# Altium PCB V2.PcbDoc
Units mil, origin at the board's own origin, x right, y up, seen from the top; angles counter-clockwise.
Board outline 3650 x 3970 mil, 2 copper layers (Top Layer, Bottom Layer); 66 components, 49 nets, 273 pads, 24 vias.
Unrouted connection lines stored in the file: 59.
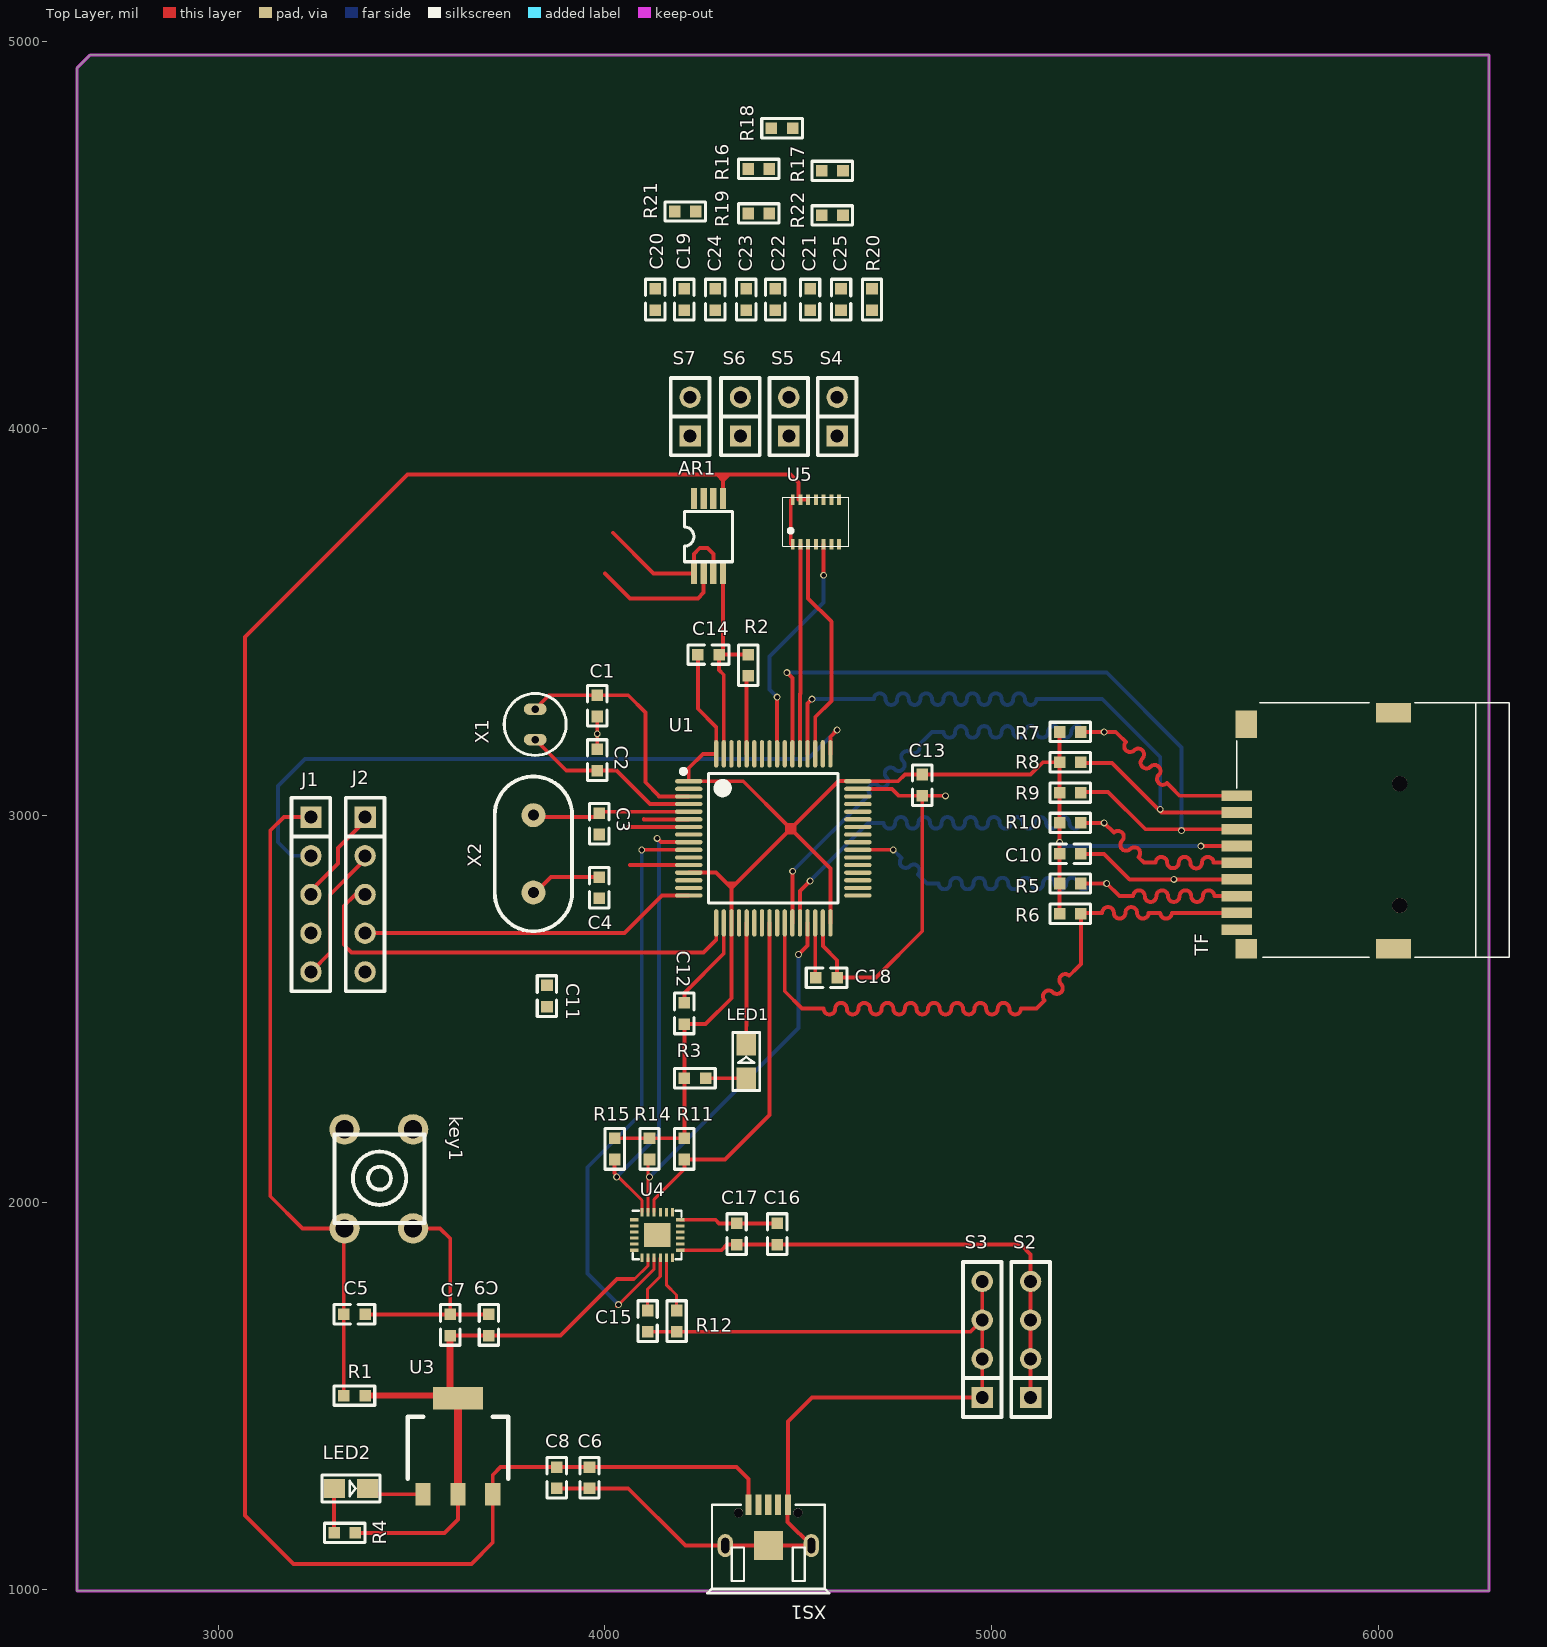
[diagram p0: Top Layer view]
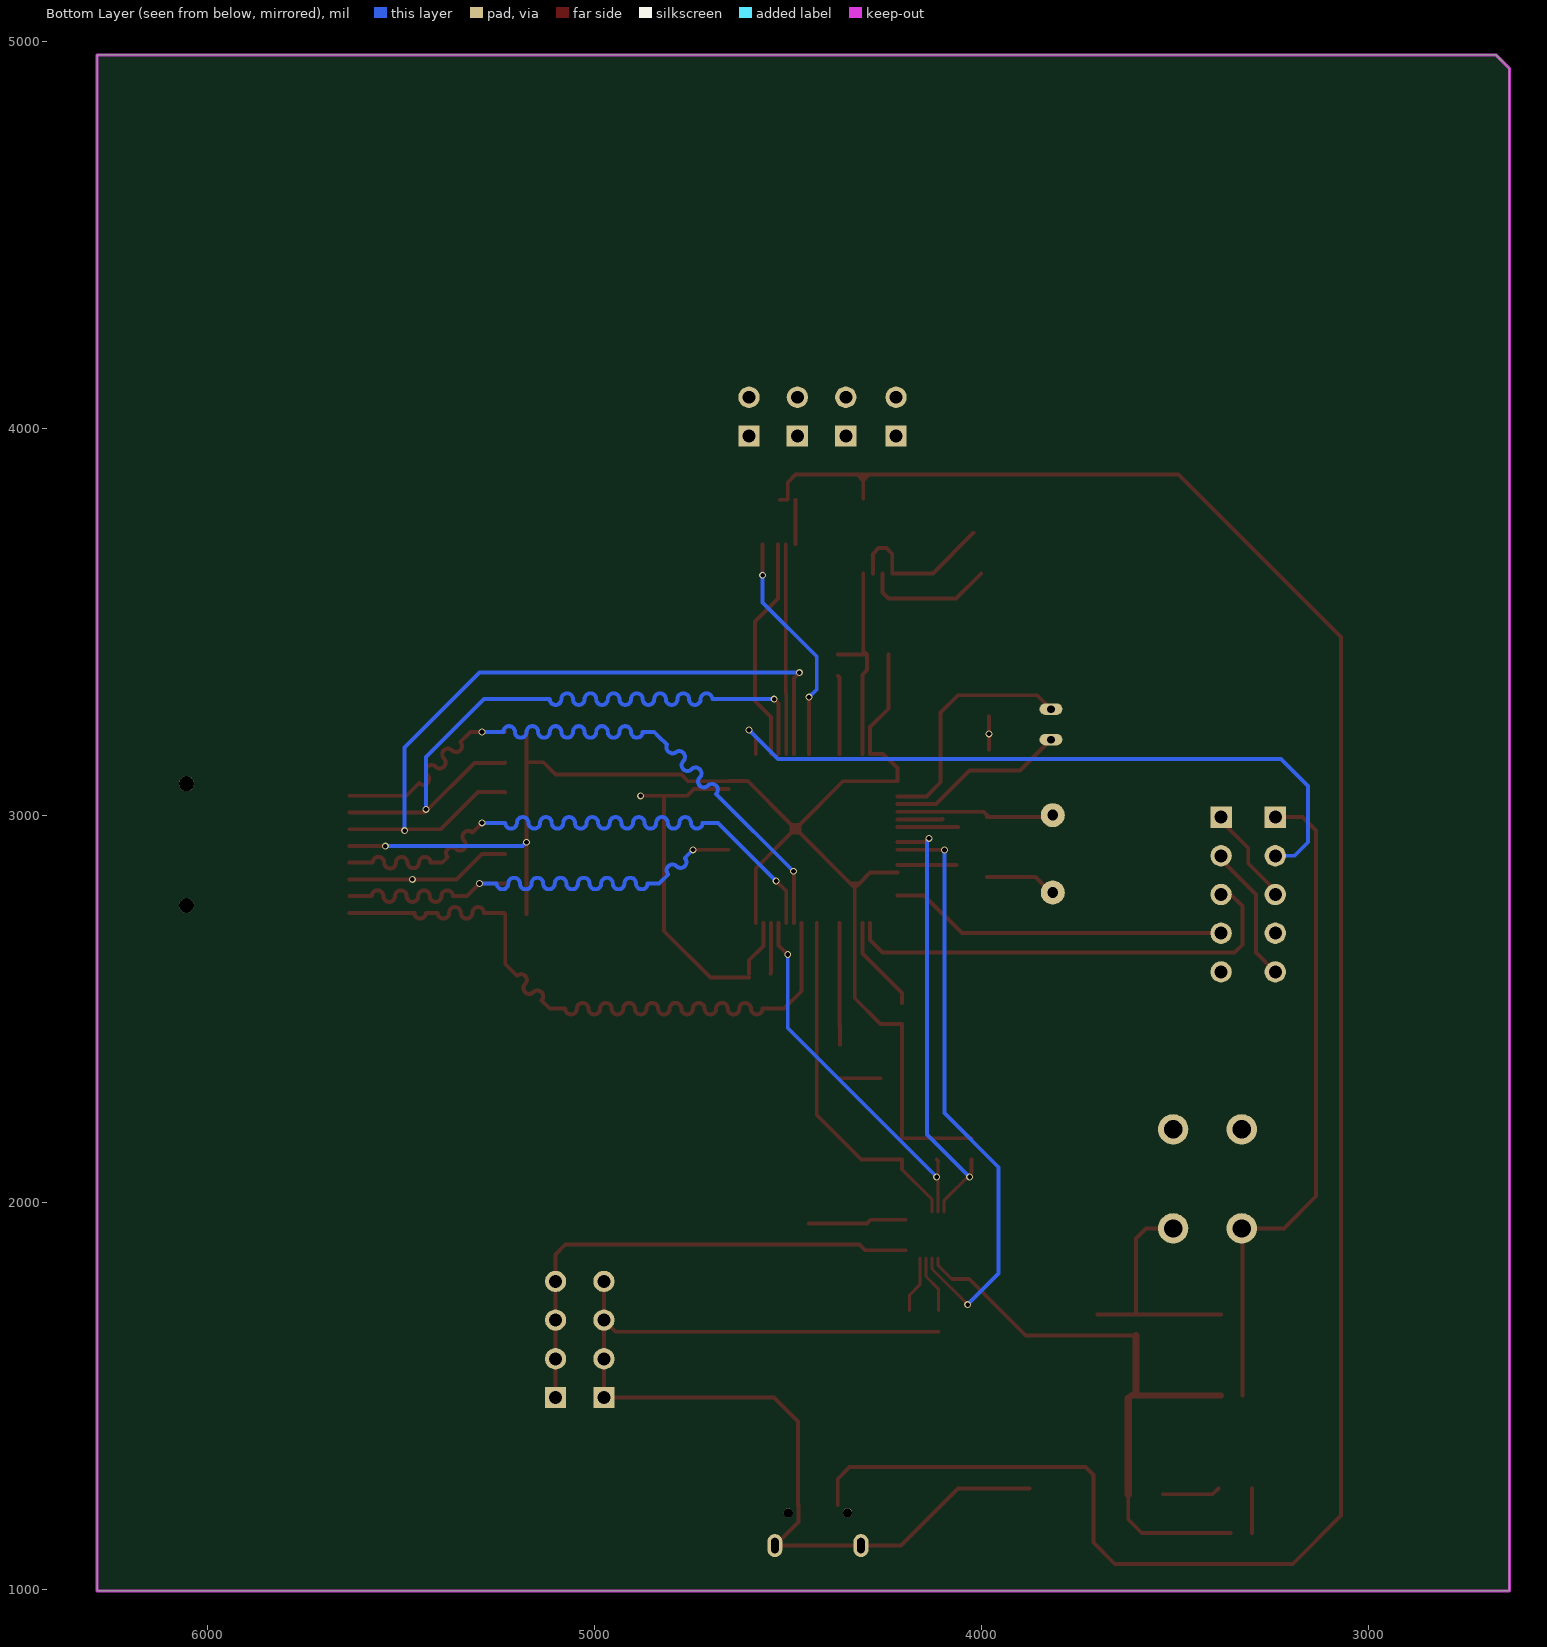
[diagram p1: Bottom Layer view, seen from below]

## Layer stack, top to bottom
Top Solder: solder mask 0.4, Solder Resist, Dk 3.5
Top Layer: signal copper 1.4
Dielectric 1: dielectric 12.6, FR-4, Dk 4.8
Bottom Layer: signal copper 1.4
Bottom Solder: solder mask 0.4, Solder Resist, Dk 3.5

## Board outline
2635,995 2635,4930 2670,4965 6285,4965 6285,995

## Design rules (kind name [scope] priority, off if disabled: settings)
Clearance [All] p1: gap=10
PolygonConnect [All] p1: connectstyle=Relief reliefconductorwidth=10 reliefentries=4 polygonreliefangle="90 Angle" airgapwidth=10
RoutingVias [All] p1: holewidth=28 width=50 viastyle="Through Hole" minholewidth=28 minwidth=50 maxholewidth=28 maxwidth=50
SolderMaskExpansion [All] p1: expansion=4
Width [All] p1: maxlimit=20 minlimit=5 preferedwidth=10
30 further rules are at their usual default settings.

## Classes and differential pairs
net class SD: SDIO_CLK SDIO_CMD SDIO_D0 SDIO_D1 SDIO_D2 SDIO_D3

## Components (designator, comment, footprint, x,y, rotation, side; value= is the part's Value field where it differs from the comment)
AR1 "运算放大器" MSOP-8 4345,3700 r90 top
C1 "10p" 0603-cap 3980,3255 r90 top
C2 "10p" 0603-cap 3980,3170 r270 top
C3 "22p" 0603-cap 3985,2950 r90 top
C4 "22p" 0603-cap 3985,2785 r90 top
C5 "0.1u" 0603-cap 3325,1710 r0 top
C6 "10u" 0603-cap 3960,1315 r270 top
C7 "10u" 0603-cap 3600,1655 r90 top
C8 "0.1u" 0603-cap 3875,1315 r270 top
C9 "0.1u" 0603-cap 3700,1655 r90 top
C10 "0.1u" 0603-cap 5175,2900 r0 top
C11 "10u" 0603-cap 3850,2505 r90 top
C12 "0.1u" 0603-cap 4205,2460 r90 top
C13 "0.1u" 0603-cap 4820,3105 r270 top
C14 "0.1u" 0603-cap 4240,3415 r0 top
C15 "0.1u" 0603-cap 4110,1665 r90 top
C16 "0.01u" 0603-cap 4445,1945 r270 top
C17 "0.1u" 0603-cap 4340,1945 r270 top
C18 "4.7u" 0603-cap 4600,2580 r180 top
C19 "10u" 0603-cap 4205,4360 r270 top
C20 "0.1u" 0603-cap 4130,4360 r270 top
C21 "0.1u" 0603-cap 4530,4305 r90 top
C22 "0.1u" 0603-cap 4440,4360 r270 top
C23 "0.1u" 0603-cap 4365,4305 r90 top
C24 "0.1u" 0603-cap 4285,4305 r90 top
C25 "0.1u" 0603-cap 4610,4305 r90 top
J1 "CON5" SIP05 3240,2995 r270 top
J2 "CON5" SIP05 3380,2995 r270 top
key1 "KEY_1" "key - duplicate5" 3440,2045 r270 top
LED1 "LED?" LED 4365,2320 r90 top
LED2 "LED?" LED 3300,1260 r0 top
R1 "10k" 0603-res 3380,1500 r180 top
R2 "10k" 0603-res 4370,3415 r270 top
R3 "1k" 0603-res 4260,2320 r180 top
R4 "1k" 0603-res 3355,1145 r180 top
R5 "4.7k" 0603-res 5175,2823.33 r0 top
R6 "4.7k" 0603-res 5175,2745 r0 top
R7 "4.7k" 0603-res 5175,3215 r0 top
R8 "4.7k" 0603-res 5175,3136.67 r0 top
R9 "4.7k" 0603-res 5175,3058.33 r0 top
R10 "4.7k" 0603-res 5175,2980 r0 top
R11 "10k" 0603-res 4205,2110 r90 top
R12 "10k" 0603-res 4185,1665 r90 top
R14 "10k" 0603-res 4115,2110 r90 top
R15 "10k" 0603-res 4025,2110 r90 top
R16 "51.1k" 0603-res 4425,4670 r180 top
R17 "51.1k" 0603-res 4615,4665 r180 top
R18 "10K-100K" 0603-res 4485,4775 r180 top
R19 "102K" 0603-res 4425,4555 r180 top
R20 "10K-100K" 0603-res 4690,4360 r270 top
R21 "1K" 0603-res 4235,4560 r180 top
R22 "1K" 0603-res 4615,4550 r180 top
S2 "CON4" SIP04 5100,1495 r90 top
S3 "CON4" SIP04 4975,1495 r90 top
S4 "CON2" SIP02 4600,3980 r90 top
S5 "CON2" SIP02 4475,3980 r90 top
S6 "CON2" SIP02 4350,3980 r90 top
S7 "CON2" SIP02 4220,3980 r90 top
TF "U2" TF-01A 5835,2960 r90 top
U1 "STM32F446RET6" LQFP-64_10X10X05P 4435,2940 r0 top
U3 "ASM117-3.3" SOT-223 3530,1245 r0 top
U4 "MPU9250" QFN-24-1EP_3X3MM_PITCH0.4MM 4135,1915 r0 top
U5 "LTC2486" DFN14 4460,3720 r0 top
X1 "32.768KHz" XTAL-B 3820,3235 r90 top
X2 "8MHz" XTAL2 3675,2910 r180 top
XS1 "USB1" "micro USB" 4425,1170 r180 top

## Footprints (in the part's own frame and the unit in brackets; to place one, negate y for a bottom-side part, rotate by r counter-clockwise, add the part's x,y. Pads: shape width x height; smd on the part's side, far side on the other; paste and mask are expansions set on the pad)
0603-cap [mil]
  rect 30x30 smd: 1(0,0) 2(55,0)
  silkscreen extent -25,-25 80,25
0603-res [mil]
  rect 30x30 smd: 1(0,0) 2(55,0)
  silkscreen extent -25,-25 80,25
DFN14 [mm]
  rect 0.25x0.7 smd: 1(0.635,-0.508) 2(1.143,-0.508) 3(1.651,-0.508) 4(2.159,-0.508) 5(2.667,-0.508) 6(3.175,-0.508) 7(3.683,-0.508) 8(3.683,2.413) 9(3.175,2.413) 10(2.667,2.413) 11(2.159,2.413) 12(1.651,2.413) 13(1.143,2.413) 14(0.635,2.413)
  silkscreen extent 0,-0.64 4.32,2.57
"key - duplicate5" [mm]
  round 2 hole 1.2: 1(2.869,-2.874) 2(-3.631,-2.874) 3(2.869,1.626) 4(-3.631,1.626)
  silkscreen extent -3.28,-3.52 2.52,2.38
LED [mm]
  rect 1.4x1.27 smd: 1(0,0) 2(2.21,0)
  silkscreen extent -0.8,-0.89 3.01,0.89
LQFP-64_10X10X05P [mm]
  oval 1.8x0.28 smd: 1(-5.55,3.75) 2(-5.55,3.25) 3(-5.55,2.75) 4(-5.55,2.25) 5(-5.55,1.75) 6(-5.55,1.25) 7(-5.55,0.75) 8(-5.55,0.25) 9(-5.55,-0.25) 10(-5.55,-0.75) 11(-5.55,-1.25) 12(-5.55,-1.75) 13(-5.55,-2.25) 14(-5.55,-2.75) 15(-5.55,-3.25) 16(-5.55,-3.75) 33(5.55,-3.75) 34(5.55,-3.25) 35(5.55,-2.75) 36(5.55,-2.25) 37(5.55,-1.75) 38(5.55,-1.25) 39(5.55,-0.75) 40(5.55,-0.25) 41(5.55,0.25) 42(5.55,0.75) 43(5.55,1.25) 44(5.55,1.75) 45(5.55,2.25) 46(5.55,2.75) 47(5.55,3.25) 48(5.55,3.75)
  oval 0.28x1.8 smd: 17(-3.75,-5.55) 18(-3.25,-5.55) 19(-2.75,-5.55) 20(-2.25,-5.55) 21(-1.75,-5.55) 22(-1.25,-5.55) 23(-0.75,-5.55) 24(-0.25,-5.55) 25(0.25,-5.55) 26(0.75,-5.55) 27(1.25,-5.55) 28(1.75,-5.55) 29(2.25,-5.55) 30(2.75,-5.55) 31(3.25,-5.55) 32(3.75,-5.55) 49(3.75,5.55) 50(3.25,5.55) 51(2.75,5.55) 52(2.25,5.55) 53(1.75,5.55) 54(1.25,5.55) 55(0.75,5.55) 56(0.25,5.55) 57(-0.25,5.55) 58(-0.75,5.55) 59(-1.25,5.55) 60(-1.75,5.55) 61(-2.25,5.55) 62(-2.75,5.55) 63(-3.25,5.55) 64(-3.75,5.55)
  silkscreen extent -6.05,-4.25 4.25,4.55
"micro USB" [mm]
  rect 0.4x1.35 smd mask+0.05: 1(1.376,-1.211) 2(0.726,-1.211) 3(0.076,-1.211) 4(-0.574,-1.211) 5(-1.224,-1.211)
  oval 1x1.5 hole 0.5 slot 1 at 90 deg unplated mask+0.05: 6(-2.749,1.465) 7(2.901,1.465)
  round 0.6 hole 0.6 mask+0.05: ""(-1.874,-0.686) ""(2.026,-0.686)
  rect 1.9x1.9 smd mask+0.05: ""(0.076,1.465)
  silkscreen extent -3.92,-1.21 4.08,4.59
MSOP-8 [mil]
  rect 55x16 smd: 1(-75,115) 2(-75,90) 3(-75,65) 4(-75,40) 5(118.11,40) 6(118.11,65) 7(118.11,90) 8(118.11,115)
  silkscreen extent -45,15 85,140
QFN-24-1EP_3X3MM_PITCH0.4MM [mm]
  rect 0.55x0.2 smd: 1(-1.5,1) 2(-1.5,0.6) 3(-1.5,0.2) 4(-1.5,-0.2) 5(-1.5,-0.6) 6(-1.5,-1) 13(1.5,-1) 14(1.5,-0.6) 15(1.5,-0.2) 16(1.5,0.2) 17(1.5,0.6) 18(1.5,1)
  rect 0.2x0.55 smd: 7(-1,-1.5) 8(-0.6,-1.5) 9(-0.2,-1.5) 10(0.2,-1.5) 11(0.6,-1.5) 12(1,-1.5) 19(1,1.5) 20(0.6,1.5) 21(0.2,1.5) 22(-0.2,1.5) 23(-0.6,1.5) 24(-1,1.5)
  rect 0.875x0.8 smd: 25(-0.435,-0.4) 25(-0.435,0.4) 25(0.435,-0.4) 25(0.435,0.4)
  silkscreen extent -1.6,-1.6 1.6,1.6
SIP02 [mm]
  rect 1.4x1.4 hole 0.85: 1(0,0)
  round 1.4 hole 0.85: 2(2.54,0)
  silkscreen extent -1.27,-1.27 3.81,1.27
SIP04 [mm]
  rect 1.4x1.4 hole 0.85: 1(0,0)
  round 1.4 hole 0.85: 2(2.54,0) 3(5.08,0) 4(7.62,0)
  silkscreen extent -1.27,-1.27 8.89,1.27
SIP05 [mm]
  rect 1.4x1.4 hole 0.85: 1(0,0)
  round 1.4 hole 0.85: 2(2.54,0) 3(5.08,0) 4(7.62,0) 5(10.16,0)
  silkscreen extent -1.27,-1.27 11.43,1.27
SOT-223 [mil]
  rect 39x59 smd: 1(0,0) 3(180,0)
  rect 38.98x59.06 smd: 2(90,0)
  rect 129.13x59 smd: 2(90,248.03)
  silkscreen extent -40,40 220,200
TF-01A [mm]
  rect 0.7x2 smd: 1(2.291,5.146) 2(1.193,5.143) 3(0.095,5.146) 4(-1.003,5.146) 5(-2.103,5.146) 6(-3.2,5.146) 7(-4.298,5.146) 8(-5.395,5.146) 9(-6.5,5.146)
  rect 1.27x1.397 smd: 10(-7.747,4.507)
  rect 1.27x2.286 smd: 11(-7.747,-5.145) 12(7.747,-5.145)
  rect 1.778x1.397 smd: 13(6.985,4.507)
  round 1 hole 1 unplated: ""(-4.915,-5.557) ""(3.084,-5.554)
  silkscreen extent -8.31,-12.76 8.39,5.14
XTAL2 [mil]
  round 62 hole 28: 1(-140,110) 2(-140,-90)
  silkscreen extent -240,-190 -40,210
XTAL-B [mm]
  oval 0.75x1.5 hole 0.5: 1(-1.011,0.008) 2(0.989,0.008)
  silkscreen extent -2.04,-2.02 2.02,2.04

## Part data
AR1: "Operational Amplifier"
C1 C2 C3 C4 C5 C6 C7 C8 C9 C10 C11 C12 C13 C14 C15 C16 C17 C18 C19 C20 C21 C22 C23 C24 C25: library part CAP
LED1 LED2: library part LED
R1 R2 R3 R4 R5 R6 R7 R8 R9 R10 R11 R12 R14 R15 R16 R17 R18 R19 R20 R21 R22: library part RES
TF: library part TF-01A
X1 X2: library part XTAL

## Via types
v1: diameter 18, hole 12, Top Layer to Bottom Layer, 24 vias

## Nets (pads, with @x,y where several pads share a name; then routed paths per layer and width w, separated by ;. In a path a pad name is that pad's centre, name@x,y a point inside that pad or via, vN(x,y) a via of type N, cw(c..) or ccw(c..) an arc to the next point about the centre after c; other vN are vias at no path point)
3.3V: C7.1 C9.1 C10.1 C11.1 C12.1 C13.1 C14.1 C16.2 C17.2 J1.5 J2.2 R1.1 R3.2 R4.1 R5.1 R6.1 R7.1 R8.1 R9.1 R10.1 R11.2 R14.2 R15.2 S2.1 S2.2 S2.3 S2.4 TF.4 U1.1 U1.13 U1.19 U1.32 U1.48 U1.64 U3.2 U4.1 U4.8 U4.13 | length 7301.7
  Top Layer w8: 4075,1800 4111.38,1836.38 U4.8 ; U4.13 4300.64,1875.63
  Top Layer w10: J1.5 3290,2645 3290,2795 3375,2880 3375,2890 J2.2 ; R4.1 3585,1145 3620,1180 U3.2@3620,1245 ; U3.2@3600,1513.03 3613.03,1500 U3.2@3620,1493.03 ; C7.1 C9.1 3885,1655 4030.93,1800.93 4074.07,1800.93 ; R15.2 R14.2 R11.2 R3.2 C12.1 4260,2460 4326.73,2526.73 U1.19 4326.73,2811.73 ; U1.13 4287.04,2851.42 4315,2823.46 ; C14.1 4240,3275 4287.36,3227.64 U1.64 ; U1.64@4286.54,3158.5 4253.5,3158.5 4216.5,3121.5 U1.1 4357.36,3087.64 4470,2975 ; 4300.64,1875.63 4315,1890 C17.2 C16.2 5075,1890 5100,1865 S2.4 S2.3 S2.2 S2.1 ; U1.32 4582.64,2862.36 4490,2955 ; U1.48 4757.64,3087.64 4775,3105 C13.1 5100,3105 5131.67,3136.67 R8.1 ; U1.48@4653.5,3088.46 4603.46,3088.46 4490,2975 ; R6.1 R5.1 C10.1 R10.1 R9.1 R8.1 ; R7.1 R8.1 ; v1(5540,2920) 5540.5,2920.5 TF.4 ; 4315,2823.46 4326.73,2811.73 ; 4315,2823.46 4338.46,2823.46 ; 4326.73,2811.73 4338.46,2823.46 ; 4338.46,2823.46 4470,2955 ; 4470,2955 4470,2975 ; 4470,2955 4480,2965 ; 4470,2955 4490,2955 ; 4470,2975 4480,2965 ; 4470,2975 4490,2975 ; 4480,2965 4490,2955 ; 4480,2965 4490,2975 ; 4490,2955 4490,2975
  Top Layer w15: R1.1 U3.2@3613.03,1500
  Top Layer w18: U3.2@3600,1513.03 C7.1
  Top Layer w20: U3.2@3620,1245 U3.2@3620,1493.03
  Bottom Layer w10: v1(5175,2930) 5185,2920 v1(5540,2920)
5V: AR1.5 C6.1 C8.1 C19.2 C20.2 R16.2 R19.2 U3.3 U5.12 U5.13 XS1.1 | length 5689.5
  Top Layer w10: AR1.5 4305,3865 ; XS1.1 4370.82,1284.18 4340,1315 C6.1 C8.1 3730,1315 3710,1295 U3.3 3710,1120 3655,1065 3195,1065 3070,1190 3070,3460 3490,3880 4290,3880 ; 4520,3815 4500,3815 4500,3860 4480,3880 4320,3880 ; 4290,3880 4305,3865 ; 4290,3880 4305,3880 ; 4305,3865 4320,3880 ; 4305,3865 4305,3880 ; 4305,3880 4320,3880
AD0/SDO: U1.10 U4.9 | length 1553.8
  Top Layer w8: v1@4030,1730 4127.12,1827.12 U4.9
  Top Layer w10: v1@4095,2910.47 U1.10
  Bottom Layer w10: v1(4035,1735) 3955,1815 3955,2090 4095,2230 v1(4095,2910)
AD1_IN6: U1.22
AD1_IN7: U1.23
BOOT0: R2.2 U1.60 | length 203.1
  Top Layer w10: U1.60 4366.1,3356.1 R2.2
CD: TF.9
CH0: C21.1 R16.1 R18.2 S4.2
CH1: C22.2 R17.2 R18.1 S5.2
CH2: C24.1 R21.1 S6.2
CH3: C25.1 R22.1 S7.2
DA1: U1.20
ESC: U4.7
ESD: U4.21
FSYNC: R12.2 U4.11 | length 146.9
  Top Layer w8: U4.11 4158.62,1786.38 4185,1760 R12.2
GND: AR1.4 C1.1 C2.1 C3.1 C4.1 C5.2 C6.2 C7.2 C8.2 C9.2 C10.2 C11.2 C12.2 C13.2 C14.2 C15.1 C16.1 C17.1 C18.1 C19.1 C20.1 C21.2 C22.1 C23.2 C24.2 C25.2 J1.3 J2.1 J2.5 key1.3 LED2.2 R2.1 R12.1 R20.1 R22.2 S3.1 S3.2 S3.3 S3.4 TF.6 U1.12 U1.18 U1.31 U1.47 U1.63 U3.1 U4.18 U4.20 U5.1 U5.4 U5.6 U5.7 U5.14 XS1.5 XS1.6 XS1.7 XS1.@4422,1112.34 | length 6638
  Top Layer w8: U4.18 4285.62,1954.38
  Top Layer w10: J1.3 3240,2805 3310,2875 3310,2915 3380,2985 J2.1 ; C5.2 C7.2 ; LED2.2 3402.02,1245 U3.1 ; key1.3 3574.01,1932.05 3600,1906.06 C7.2 ; C9.2 C7.2 ; C8.2 C6.2 4060,1260 4207.66,1112.34 XS1.7 4422,1112.34 XS1.6 4471.96,1173.6 4471.96,1216.44 XS1.5 4473.18,1433.18 4535,1495 S3.1 S3.2 S3.3 ; C2.1 C1.1 ; 4063.9,2871.1 U1.12 ; C15.1 R12.1 4945,1665 S3.3 ; C12.2 4205,2540 4307.05,2642.05 U1.18 ; 4285.62,1954.38 4295,1945 C17.1 C16.1 ; AR1.4 4305,3425 C14.2 ; U1.63 4307.05,3362.95 4295,3375 C14.2 ; R2.1 C14.2 ; 4480,3700 4480,3815 ; U1.31 4562.95,2662.05 4600,2625 C18.1@4600,2590 ; C18.1 4700,2580 4820,2700 C13.2 ; U1.47 4742.05,3067.95 4760,3050 C13.2 ; v1(4880,3050) C13.2 ; S3.4 S3.3 ; C10.2 5290,2900 5356,2834 TF.6
  other v1: 5470,2834 3980,3210
INT: U1.14 U4.12
LED: LED1.2 U1.21 | length 314.9
  Top Layer w10: LED1.2 4365,2455 4366.1,2456.1 U1.21
NCS: R11.1 U1.24 U4.22 | length 932.4
  Top Layer w8: U4.22 4127.12,2007.12 4205,2085
  Top Layer w10: 4205,2085 R11.1 4310,2110 4425,2225 4425,2525 4425.16,2525.16 U1.24
NetAR1_1: AR1.1 AR1.3 R21.2 | length 415.9
  Top Layer w10: 4020,3730 4125,3625 AR1.1 4230,3675 4245,3690 4265,3690 4280,3675 AR1.3
NetAR1_2: AR1.2 C23.1 R19.1 R20.2 | length 338.1
  Top Layer w10: 4000,3625 4065,3560 4240,3560 4255,3575 AR1.2
NetC1_2: C1.2 U1.3 X1.2 | length 626.3
  Top Layer w10: X1.2 3855.75,3310 C1.2 4060,3310 4105,3265 4105,3085 4140,3050 4140,3048.58 ; 4140,3048.27 U1.3
NetC2_2: C2.2 U1.4 X1.1 | length 465.8
  Top Layer w10: X1.1 3899.87,3115 C2.2 4030,3115 4116.42,3028.58 U1.4
NetC3_2: C3.2 U1.5 X2.2 | length 402.3
  Top Layer w10: X2.2@3820,3000 3825,2995 C3.2@3985,2995 ; C3.2@3985,3000 3993.9,3008.9 U1.5
NetC4_2: C4.2 U1.6 X2.1 | length 298.4
  Top Layer w10: X2.1@3820,2800 3860,2840 C4.2 ; 4100,2990 4100.79,2989.21 U1.6
NetC15_2: C15.2 U4.10 | length 149.6
  Top Layer w8: C15.2 4110,1775 4142.88,1807.88 U4.10
NetC18_2: C18.2 U1.30 | length 132.2
  Top Layer w10: U1.30 4543.27,2591.73 C18.2@4545,2590
NetLED1_1: LED1.1 R3.1 | length 105
  Top Layer w10: R3.1 LED1.1
NetLED2_1: LED2.1 R4.2 | length 115
  Top Layer w10: R4.2 LED2.1
NetS4_1: S4.1 U5.8
NetS5_1: S5.1 U5.9
NetS6_1: S6.1 U5.10
NetS7_1: S7.1 U5.11
NRST: C5.1 J1.1 key1.1 R1.2 U1.7 | length 1880
  Top Layer w10: J1.1 3170,2995 3135,2960 3135,2015 3217.95,1932.05 key1.1 3325,1930.2 C5.1 R1.2 ; 4060,2969.53 U1.7
SCK: U1.51 U5.3 | length 583.6
  Top Layer w10: U5.3 4525,3560 4585,3500 4585,3295 4543.27,3253.27 U1.51
SCL: R14.1 U1.29 U4.23 | length 963.2
  Top Layer w8: U4.23 R14.1@4111.38,2106.37
  Top Layer w10: R14.1@4111.38,2106.37 R14.1 ; v1(4500,2640) 4523.58,2663.58 U1.29
  Bottom Layer w10: v1(4115,2065) 4500,2450 v1(4500,2640)
SDA/SDI: R15.1 U1.9 U4.24 | length 1173.4
  Top Layer w8: 4025,2075 4095.64,2004.37 U4.24
  Top Layer w10: 4025,2075 R15.1 ; v1(4135,2940) 4144.84,2930.16 U1.9
  Bottom Layer w10: v1(4030,2065) 4140,2175 4140,2935 v1(4135,2940)
SDI: U1.53 U5.2 | length 542.1
  Top Layer w10: U1.53 4503.9,3313.9 4505,3314.69 U5.2
SDIO_CLK: R10.2 TF.5 U1.28 | length 1813.1
  Top Layer w10: U1.28 4503.9,2803.9 v1(4530,2830) ; R10.2 v1(5290,2980) 5315,2955 cw(c5325.61,2944.39) 5336.21,2933.79 ccw(c5346.82,2923.18) 5357.43,2912.57 cw(c5368.03,2901.97) 5378.64,2891.36 5392.8,2877.2 5422.8,2877.2 cw(c5437.8,2877.2) 5452.8,2877.2 ccw(c5467.8,2877.96) 5482.8,2877.2 cw(c5497.8,2877.2) 5512.8,2877.2 ccw(c5527.8,2877.2) 5542.8,2877.2 cw(c5557.8,2877.2) 5572.8,2877.2 5580,2877.2 TF.5
  Bottom Layer w10: v1(4530,2830) 4680,2980 4690,2980 4720,2980 ccw(c4735,2980) 4750,2980 cw(c4765,2980) 4780,2980 ccw(c4795,2980) 4810,2980 cw(c4825,2980) 4840,2980 ccw(c4855,2980) 4870,2980 cw(c4885,2980) 4900,2980 ccw(c4915,2980) 4930,2980 cw(c4945,2980) 4960,2980 ccw(c4975,2980) 4990,2980 cw(c5005,2980) 5020,2980 ccw(c5035,2980) 5050,2980 cw(c5065,2980) 5080,2980 ccw(c5095,2980) 5110,2980 cw(c5125,2980) 5140,2980 ccw(c5155,2980) 5170,2980 cw(c5185,2980) 5200,2980 ccw(c5215,2980) 5230,2980 5250,2980 v1(5290,2980)
SDIO_CMD: R9.2 TF.3 U1.54 | length 1973.9
  Top Layer w10: v1(4470,3368.42) 4484.21,3354.21 U1.54 ; R9.2 5231.67,3060 5300,3060 5396.25,2963.75 TF.3
  Bottom Layer w10: v1(4470,3368.42) 5296.58,3368.42 5490,3175 v1(5490,2960)
SDIO_D0: R5.2 TF.7 U1.39 | length 1471.9
  Top Layer w10: U1.39 v1(4745,2910.47) ; R5.2 v1(5296.67,2823.33) 5329.2,2790.8 5365,2790.8 cw(c5380,2790.8) 5395,2790.8 ccw(c5410,2790.8) 5425,2790.8 cw(c5440,2790.8) 5455,2790.8 ccw(c5470,2790.8) 5485,2790.8 cw(c5500,2790.8) 5515,2790.8 ccw(c5530,2790.8) 5545,2790.8 cw(c5560,2790.8) 5575,2790.8 5605,2790.8 5615,2790.8 TF.7
  Bottom Layer w10: v1(4745,2910.47) 4766.21,2889.26 ccw(c4776.82,2878.65) 4787.43,2868.04 cw(c4798.03,2857.44) 4808.64,2846.83 4829.85,2825.62 4832.14,2823.33 4862.14,2823.33 ccw(c4877.14,2823.33) 4892.14,2823.33 cw(c4907.14,2823.33) 4922.14,2823.33 ccw(c4937.14,2823.33) 4952.14,2823.33 cw(c4967.14,2823.33) 4982.14,2823.33 ccw(c4997.14,2823.33) 5012.14,2823.33 cw(c5027.14,2823.33) 5042.14,2823.33 ccw(c5057.14,2823.33) 5072.14,2823.33 cw(c5087.14,2823.33) 5102.14,2823.33 ccw(c5117.14,2823.33) 5132.14,2823.33 cw(c5147.14,2823.33) 5162.14,2823.33 ccw(c5177.14,2823.33) 5192.14,2823.33 cw(c5207.14,2823.33) 5222.14,2823.33 ccw(c5237.14,2823.33) 5252.14,2823.33 5275,2823.33 v1(5296.67,2823.33)
SDIO_D1: R6.2 TF.8 U1.26 | length 1970.3
  Top Layer w10: U1.26 4464.53,2545 4509.53,2500 ; 4510,2500 4509.53,2500 ; TF.8 5550,2747.6 5525,2747.6 5495,2747.6 5465,2747.6 cw(c5450,2747.6) 5435,2747.6 5405,2747.6 cw(c5390,2747.6) 5375,2747.6 ccw(c5360,2747.6) 5345,2747.6 cw(c5330,2747.6) 5315,2747.6 ccw(c5300,2747.6) 5285,2747.6 5232.6,2747.6 R6.2 5230,2680 5230,2615 5221.07,2606.07 5199.85,2584.85 ccw(c5189.25,2574.25) 5178.64,2563.64 cw(c5168.03,2553.03) 5157.43,2542.43 ccw(c5146.82,2531.82) 5136.21,2521.21 5115,2500 5105,2500 5075,2500 cw(c5060,2500) 5045,2500 ccw(c5030,2500) 5015,2500 cw(c5000,2500) 4985,2500 ccw(c4970,2500) 4955,2500 cw(c4940,2500) 4925,2500 ccw(c4910,2500) 4895,2500 cw(c4880,2500) 4865,2500 ccw(c4850,2500) 4835,2500 cw(c4820,2500) 4805,2500 ccw(c4790,2500) 4775,2500 cw(c4760,2500) 4745,2500 ccw(c4730,2500) 4715,2500 cw(c4700,2500) 4685,2500 ccw(c4670,2500) 4655,2500 cw(c4640,2500) 4625,2500 ccw(c4610,2500) 4595,2500 cw(c4580,2500) 4565,2500 4535,2500 4509.53,2500
SDIO_D2: R7.2 TF.1 U1.27 | length 1943.9
  Top Layer w10: U1.27 4484.21,2854.21 v1(4485,2855) ; R7.2 v1(5290,3215) 5320,3215 5325,3210 5346.21,3188.79 ccw(c5356.82,3178.18) 5367.43,3167.57 cw(c5378.03,3156.97) 5388.64,3146.36 ccw(c5399.25,3135.75) 5409.85,3125.15 cw(c5420.46,3114.54) 5431.07,3103.93 ccw(c5441.67,3093.33) 5452.28,3082.72 5462.5,3072.5 5484.8,3050.2 TF.1
  Bottom Layer w10: v1(4485,2855) 4685,3055 cw(c4695.61,3065.61) 4706.21,3076.21 ccw(c4716.82,3086.82) 4727.43,3097.43 cw(c4738.03,3108.03) 4748.64,3118.64 ccw(c4759.25,3129.25) 4769.85,3139.85 cw(c4780.46,3150.46) 4791.07,3161.07 ccw(c4797.49,3175.85) 4812.28,3182.28 4833.49,3203.49 4845,3215 4875,3215 ccw(c4890,3215) 4905,3215 cw(c4920,3215) 4935,3215 ccw(c4950,3215) 4965,3215 cw(c4980,3215) 4995,3215 ccw(c5010,3215) 5025,3215 cw(c5040,3215) 5055,3215 ccw(c5070,3215) 5085,3215 cw(c5100,3215) 5115,3215 ccw(c5130,3215) 5145,3215 cw(c5160,3215) 5175,3215 ccw(c5190,3215) 5205,3215 cw(c5220,3215) 5235,3215 5260,3215 v1(5290,3215)
SDIO_D3: R8.2 TF.2 U1.52 | length 1939.3
  Top Layer w10: U1.52 4523.58,3288.58 v1(4535,3300) ; R8.2 5231.67,3135 5310,3135 5438.05,3006.95 TF.2
  Bottom Layer w10: v1(4535,3300) 4695,3300 cw(c4710,3300) 4725,3300 ccw(c4740,3300) 4755,3300 cw(c4770,3300) 4785,3300 ccw(c4800,3300) 4815,3300 cw(c4830,3300) 4845,3300 ccw(c4860,3300) 4875,3300 cw(c4890,3300) 4905,3300 ccw(c4920,3300) 4935,3300 cw(c4950,3300) 4965,3300 ccw(c4980,3300) 4995,3300 cw(c5010,3300) 5025,3300 ccw(c5040,3300) 5055,3300 cw(c5070,3300) 5085,3300 ccw(c5100,3300) 5115,3300 5145,3300 5175,3300 5205,3300 5235,3300 5240,3300 5285,3300 5435,3150 v1(5435,3015)
SDO: U1.56 U5.5 | length 612.8
  Top Layer w10: U1.56 4444.84,3304.84 v1(4445,3305) ; v1(4565,3620) U5.5
  Bottom Layer w10: v1(4445,3305) 4425,3325 4425,3410 4565,3550 v1@4565,3625
TCK_SWCLK: J1.2 U1.49 | length 1818.2
  Top Layer w10: U1.49 4582.64,3202.64 v1(4600,3220)
  Bottom Layer w10: J1.2 3190,2895 3155,2930 3155,3075 3225,3145 4525,3145 v1(4600,3220)
TMS_SWDIO: J1.4 U1.46
U2_RX: J2.3 U1.17 | length 1195.6
  Top Layer w10: J2.3 3355,2795 3325,2765 3325,2665 3345,2645 4255,2645 4287.36,2677.36 U1.17
U2_TX: J2.4 U1.16 | length 876.8
  Top Layer w10: J2.4 4050,2695 4147.36,2792.36 U1.16
pads on no net: AR1.6 AR1.7 AR1.8 key1.2 key1.4 R17.1 TF. TF.10 TF.11 TF.12 TF.13 U1.2 U1.8 U1.11 U1.15 U1.25 U1.33 U1.34 U1.35 U1.36 U1.37 U1.38 U1.40 U1.41 U1.42 U1.43 U1.44 U1.45 U1.50 U1.55 U1.57 U1.58 U1.59 U1.61 U1.62 U4.2 U4.3 U4.4 U4.5 U4.6 U4.14 U4.15 U4.16 U4.17 U4.19 U4.25 XS1.2 XS1.3 XS1.4 XS1.@4345.23,1196.99 XS1.@4498.77,1196.99

## Keep-outs
Keep-Out Layer:
  the board outline again, w8